# Allegro board VGroupV_PCB.brd
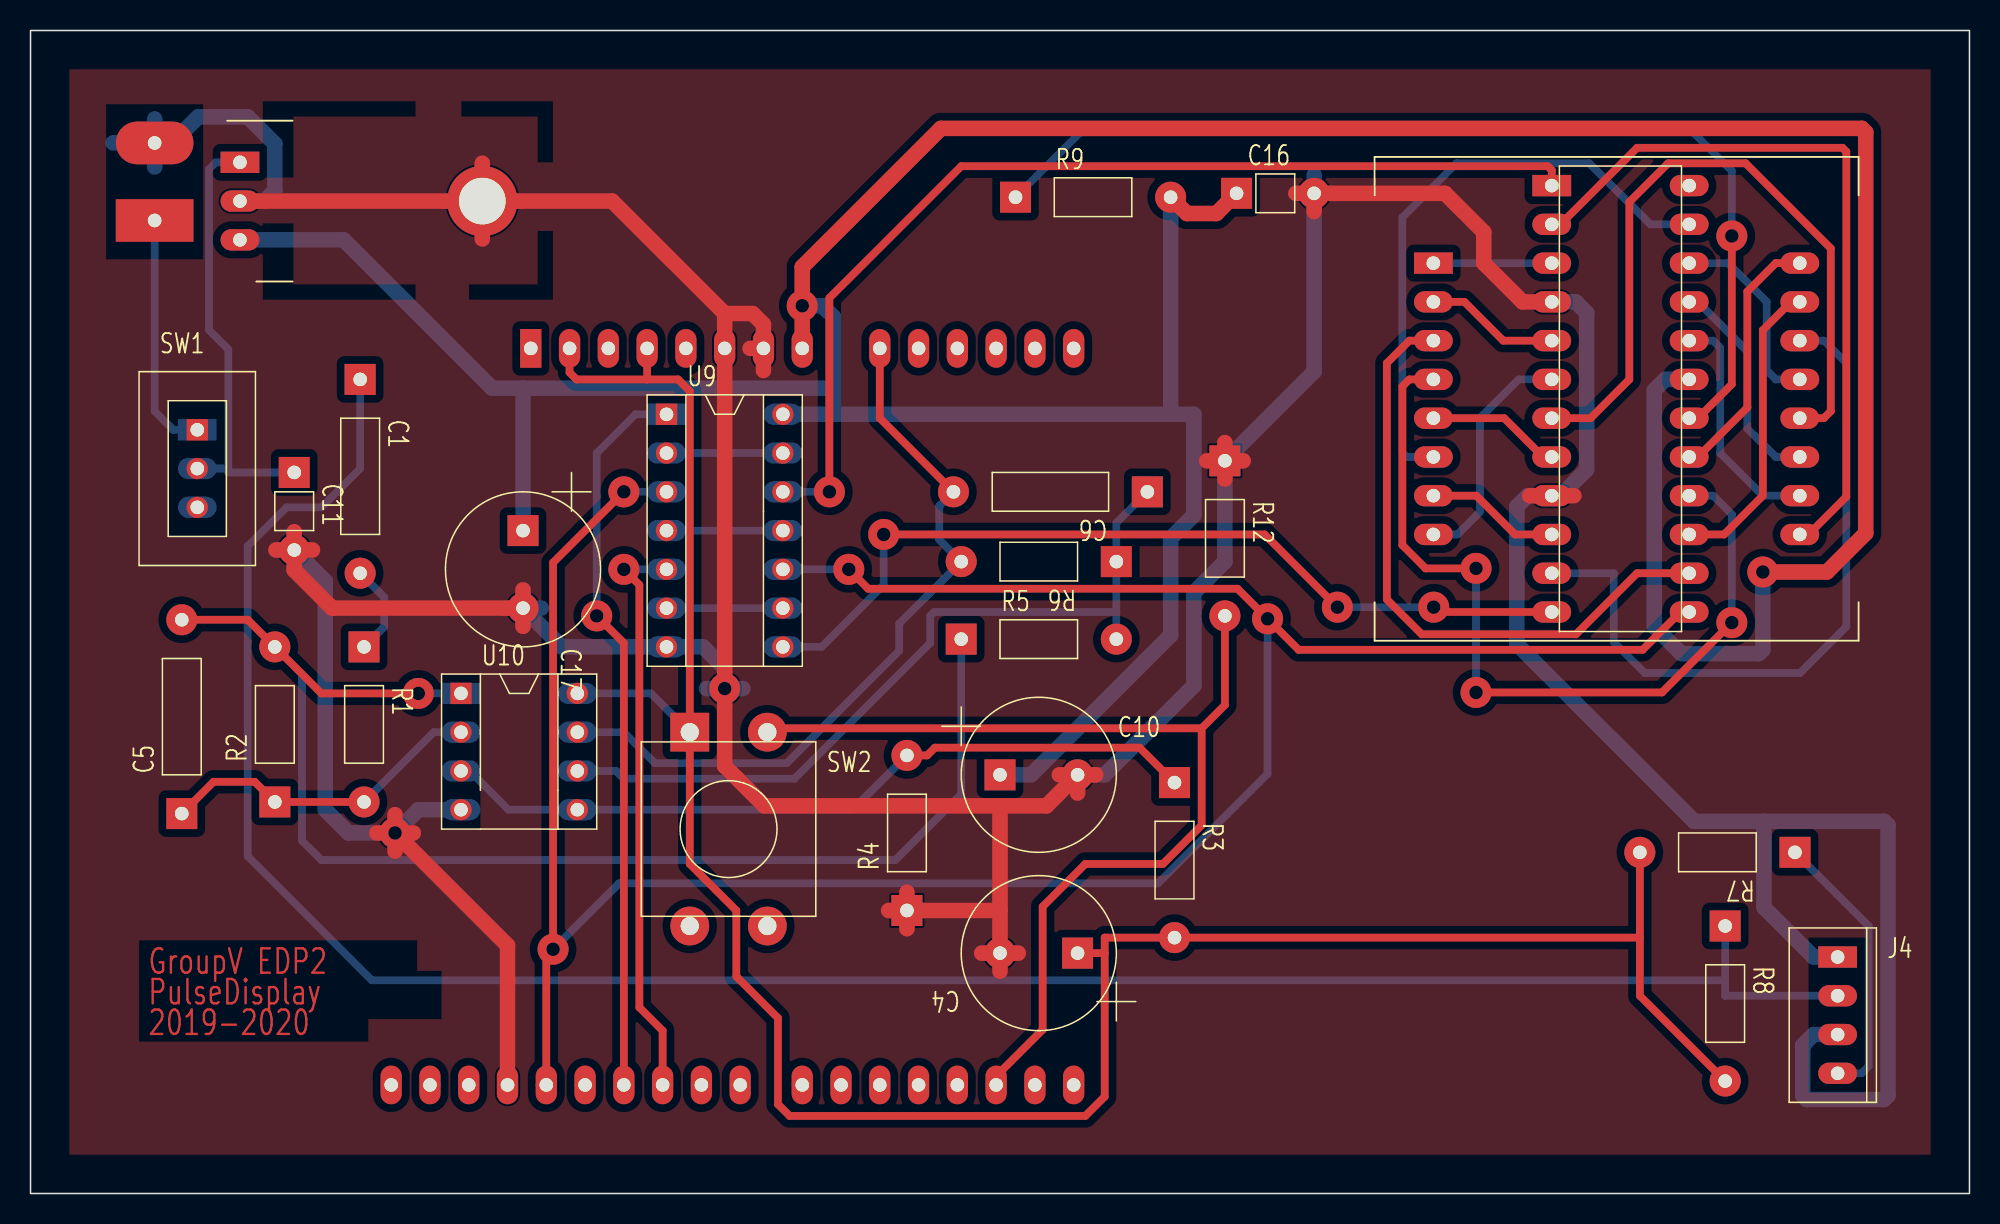
[diagram p0: board, top side]
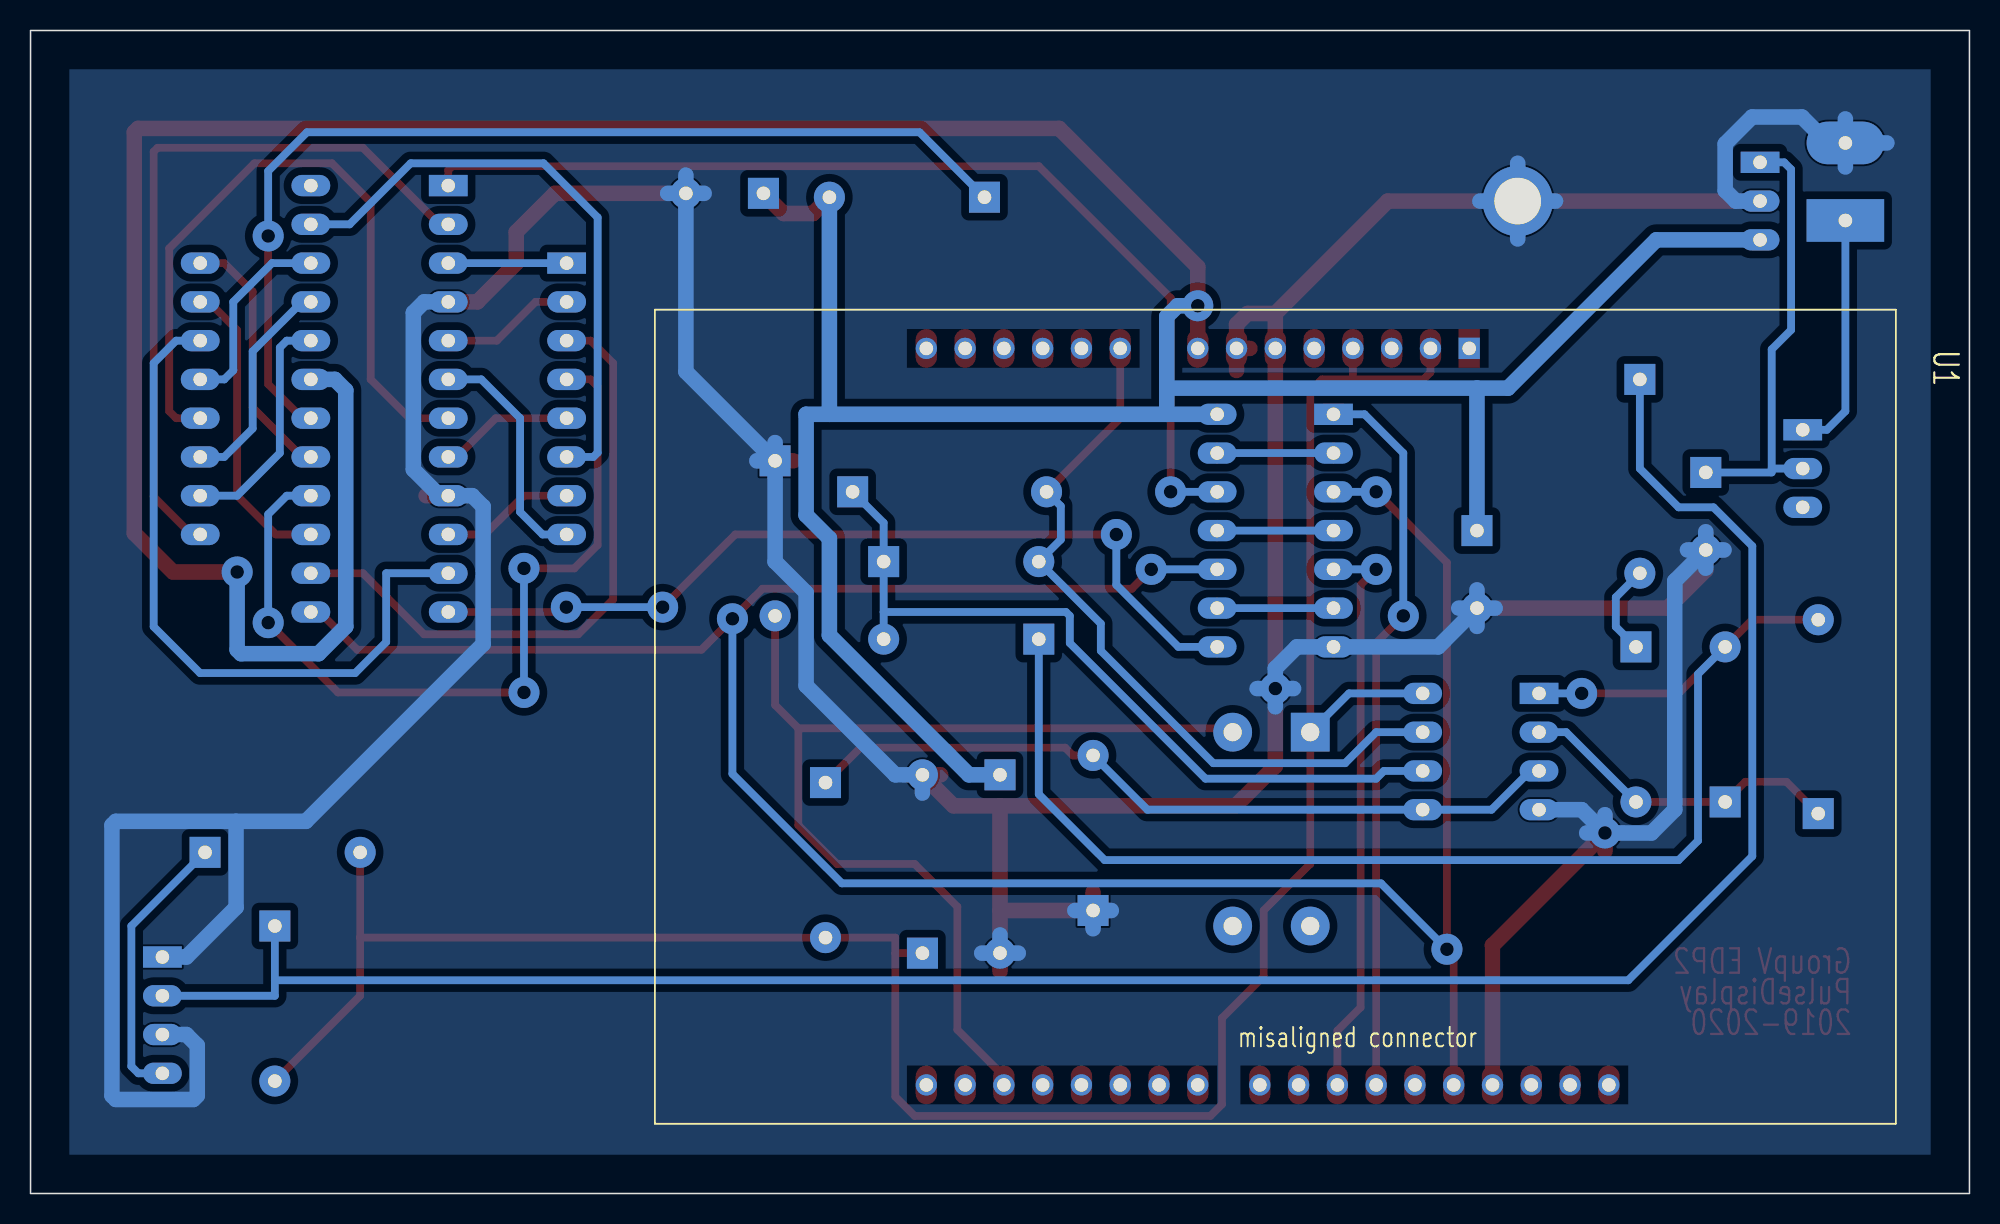
[diagram p1: board, bottom side, seen from below]

Outline 127 x 76.2 mm; copper layers: TOP, BOTTOM. Coordinates in mm from the lower left corner of the outline.
Outline path: rectangle 0,0 127,76.2

## Design rules (mm)
constraint set DEFAULT: min track width 0.508
nets with their own width: min track width 1.016; nets GND VCC

## Placement (name value [footprint] x y rotation side)
C1  1u  [GU-RC500]  21.59 53.34 270 top
C4  220U  [GU-CAPCYL200]  68.58 15.75 180 top
C5  1n  [GU-RC500]  9.91 24.89 90 top
C6  1n  [GU-RC500]  73.15 45.97 180 top
C10  220u  [GU-CAPCYL200]  63.5 27.43 0 top
C11  0.1u  [GU-RC200]  17.27 47.24 270 top
C16  0.1u  [GU-RC200]  78.99 65.53 0 top
C17  10u  [GU-CAPCYL200]  32.26 43.43 270 top
DN1  LedArr-8x8  [8X8-LED-TRUOPTO]  103.89 52.07 270 top
J1  BATTERY 9V  [GU-TERMINAL2-200]  8.13 63.75 180 top
J4  CON4  [GU-MOLEX4]  118.36 15.49 0 top
R1  10k  [GU-RC400]  21.84 35.81 270 top
R2  50k  [GU-RC400]  16 25.65 90 top
R3  100k  [GU-RC400]  74.93 26.92 270 top
R4  100k  [GU-RC400]  57.4 18.54 90 top
R5  1k  [GU-RC400]  60.96 36.32 0 top
R6  50k  [GU-RC400]  71.12 41.4 180 top
R7  100  [GU-RC400]  115.57 22.35 180 top
R8  10k  [GU-RC400]  111 17.53 270 top
R9  30k  [GU-RC400]  64.52 65.28 0 top
R12  3k3  [GU-RC400]  78.23 48.01 270 top
SW1  SW_SL_SPDT  [GU-SW-SLIDE-SPDT]  10.92 50.04 0 top
SW2  SW PUSHBUTTON-SPST-2/SM  [GU-PUSH52]  43.18 30.23 0 top
U1  FRDM-KL25Z-Arduino  [GU-FRDM-ARDUINO]  32.77 55.37 270 bottom
U5  LM2937  [GU-LM2937]  13.72 67.56 0 top
U8  MAX7221  [GU-DIP24]  104.14 52.07 0 top
U9  74HCT04  [GU-DIPSOCK14]  41.66 51.05 0 top
U10  MCP6292  [GU-DIPSOCK8]  28.19 32.77 0 top

## Library data of the parts
C1 C5 C6 = C
C4 = C_elect_0
C10 C11 C16 C17 = CAPACITOR NON-POL
DN1 = LedArr-8x8
J1 = CON2: User Part Number: TERMINAL2-200
J4 = CON4
R1-R9 R12 = R
SW1 = SW_SL_SPDT
SW2 = SW PUSHBUTTON-SPST-2/SM_1
U1 = FRDM-KL25Z-Arduino
U5 = LM2937_0
U8 = MAX7221_7
U9 = 74HCT04
U10 = MCP6292

## Footprints (pads in the part's own frame, mm; a bottom-side part is the same pattern mirrored in y, then rotated)
8X8-LED-TRUOPTO
  rect 1.397x2.54 hole 0.889: 1(-8.89,-12)
  oval 1.397x2.54 hole 0.889: 2(-6.35,-12) 3(-3.81,-12) 4(-1.27,-12) 5(1.27,-12) 6(3.81,-12) 7(6.35,-12) 8(8.89,-12) 9(8.89,12) 10(6.35,12) 11(3.81,12) 12(1.27,12) 13(-1.27,12) 14(-3.81,12) 15(-6.35,12) 16(-8.89,12)
GU-CAPCYL200
  rect 2.032x2.032 hole 0.889: 1(0,0)
  round 2.032 hole 0.889: 2(5.08,0)
GU-DIP24
  rect 2.54x1.397 hole 0.889: 1(-4.5,13.97)
  oval 2.54x1.397 hole 0.889: 2(-4.5,11.43) 3(-4.5,8.89) 4(-4.5,6.35) 5(-4.5,3.81) 6(-4.5,1.27) 7(-4.5,-1.27) 8(-4.5,-3.81) 9(-4.5,-6.35) 10(-4.5,-8.89) 11(-4.5,-11.43) 12(-4.5,-13.97) 13(4.5,-13.97) 14(4.5,-11.43) 15(4.5,-8.89) 16(4.5,-6.35) 17(4.5,-3.81) 18(4.5,-1.27) 19(4.5,1.27) 20(4.5,3.81) 21(4.5,6.35) 22(4.5,8.89) 23(4.5,11.43) 24(4.5,13.97)
GU-DIPSOCK8
  rect 1.397x1.397 hole 0.889: 1(0,0)
  round 1.397 hole 0.889: 2(0,-2.54) 3(0,-5.08) 4(0,-7.62) 5(7.62,-7.62) 6(7.62,-5.08) 7(7.62,-2.54) 8(7.62,0)
GU-DIPSOCK14
  rect 1.397x1.397 hole 0.889: 1(0,0)
  round 1.397 hole 0.889: 2(0,-2.54) 3(0,-5.08) 4(0,-7.62) 5(0,-10.16) 6(0,-12.7) 7(0,-15.24) 8(7.62,-15.24) 9(7.62,-12.7) 10(7.62,-10.16) 11(7.62,-7.62) 12(7.62,-5.08) 13(7.62,-2.54) 14(7.62,0)
GU-FRDM-ARDUINO
  rect 2.54x1.397 hole 0.889: 1(0,0)
  oval 2.54x1.397 hole 0.889: 2(0,-2.54) 3(0,-5.08) 4(0,-7.62) 5(0,-10.16) 6(0,-12.7) 7(0,-15.24) 8(0,-17.78) 9(0,-22.86) 10(0,-25.4) 11(0,-27.94) 12(0,-30.48) 13(0,-33.02) 14(0,-35.56) 15(48.26,-35.56) 16(48.26,-33.02) 17(48.26,-30.48) 18(48.26,-27.94) 19(48.26,-25.4) 20(48.26,-22.86) 21(48.26,-20.32) 22(48.26,-17.78) 23(48.26,-13.716) 24(48.26,-11.176) 25(48.26,-8.636) 26(48.26,-6.096) 27(48.26,-3.556) 28(48.26,-1.016) 29(48.26,1.524) 30(48.26,4.064) 31(48.26,6.604) 32(48.26,9.144)
GU-LM2937
  rect 2.54x1.397 hole 0.889: 1(0,0)
  oval 2.54x1.397 hole 0.889: 2(0,-2.54) 3(0,-5.08)
  round 4.6 hole 3.05: 4(15.875,-2.54)
GU-MOLEX4
  rect 2.54x1.397 hole 0.889: 1(0,0)
  oval 2.54x1.397 hole 0.889: 2(0,-2.54) 3(0,-5.08) 4(0,-7.62)
GU-PUSH52
  rect 2.54x2.54 hole 1.194: 1(0,0)
  round 2.54 hole 1.194: 2(5.08,0) 3(0,-12.7) 4(5.08,-12.7)
GU-RC200
  rect 2.032x2.032 hole 0.889: 1(0,0)
  round 2.032 hole 0.889: 2(5.08,0)
GU-RC400
  rect 2.032x2.032 hole 0.889: 1(0,0)
  round 2.032 hole 0.889: 2(10.16,0)
GU-RC500
  rect 2.032x2.032 hole 0.889: 1(0,0)
  round 2.032 hole 0.889: 2(12.7,0)
GU-SW-SLIDE-SPDT
  rect 1.397x1.397 hole 0.889: 1(0,0)
  round 1.397 hole 0.889: 2(0,-2.54) 3(0,-5.08)
GU-TERMINAL2-200
  rect 5.08x2.794 hole 0.889: 1(0,0)
  oval 5.08x2.794 hole 0.889: 2(0,-5.08)

## Nets
3V3: C4.1 R3.2 R7.2 R8.2 SW2.1(4) U1.2 U1.4 U10.8
GND: C4.2(-) C10.2 C11.2 C16.2 C17.2 J1.2 J4.1 J4.3 R4.1 R12.1 U1.6 U1.7 U1.29 U5.2 U5.4 U8.4 U8.9 U9.7 U10.4
VCC: C10.1 C16.1 C17.1 R9.2 U1.8 U5.3(OUT) U8.19(VCC) U9.14
VIN: C1.1 J4.2 R8.1
CS: U8.12 U9.8
LOAD: U1.25 U9.5
MOSI: U1.26 U9.1
SCLK: U1.28 U8.13 U9.3 U9.10
SDI: U8.1 U9.12(Y)
VOUT: C6.2 R6.2 U1.9 U10.7(OUT)
VREF: R3.1 R4.2 U10.3 U10.5
N08137: C5.1 R1.2 R2.1 U10.2
N08145: C5.2 R2.2 R5.1 U10.1
N08157: C6.1 R5.2 R6.1 U10.6
N08433: C1.2 R1.1
N10280: J4.4 R7.1
N13184: U9.4 U9.11
N13188: U9.2 U9.13
N13195: U9.6 U9.9
N25169: DN1.16 U8.17
N25451: DN1.13 U8.22
N25464: DN1.3 U8.14
N25471: DN1.4 U8.16
N25478: DN1.10 U8.20
N25485: DN1.6 U8.23
N25492: DN1.11 U8.21
N25499: DN1.15 U8.15
N28309: J1.1 SW1.1
N28319: C11.1 SW1.2 U5.1
N29244: R12.2 SW2.2 U1.17
N68469: R9.1 U8.18
N1135613: DN1.9 U8.2
N1135614: DN1.14 U8.11
N1135615: DN1.8 U8.6
N1135616: DN1.12 U8.7
N1135617: DN1.1 U8.3
N1135618: DN1.7 U8.10
N1135619: DN1.2 U8.5
N1135620: DN1.5(RA8) U8.8

Pads without a net: SW1 3; SW2 3 4; U1 1 3 5 10 11 12 13 14 15 16 18 19 20 21 22 23 24 27 30 31 32; U8 24

## Via types
v1: diameter 2.032, hole 0.889, TOP to BOTTOM, 19 vias

## Routing (per net, layer and track width the routed paths; a pad name or vN(x,y) marks a point on that pad's centre or on a via; arc(x,y) is an arc through that point)
3V3: length 156.3
  TOP w0.508: C4.1 70.36,15.75 ; 70.36,15.75 70.36,16.76 R3.2 105.41,16.76 ; 70.36,15.75 70.36,6.35 69.09,5.08 49.72,5.08 48.96,5.84 48.96,11.49 46.23,14.22 46.23,18.54 43.18,21.59 SW2.1 43.18,52.58 42.42,53.34 40.39,53.34 ; 105.41,16.76 105.41,12.95 R8.2 ; 105.41,16.76 R7.2 ; U1.2 35.31,53.8 35.76,53.34 40.39,53.34 ; 40.39,53.34 U1.4
  BOTTOM w0.508: SW2.1 40.64,32.77 U10.8
GND: length 453.3
  TOP w1.016: R4.1 63.5,18.54 ; R4.1 57.4,17.35 ; R4.1 57.4,19.74 ; R4.1 56.21,18.54 ; 63.5,18.54 C4.2 ; 63.5,18.54 63.5,25.4 ; 29.59,62.55 U5.4 ; U5.4 U5.2 ; U5.4 38.1,65.02 45.47,57.66 ; U5.4 29.59,67.5 ; U8.4 97.73,58.42 95.19,60.96 95.19,62.99 92.65,65.53 C16.2 ; 78.23,46.81 R12.1 ; R12.1 77.04,48.01 ; R12.1 79.43,48.01 ; R12.1 78.23,49.2 ; C4.2 62.31,15.75 ; C4.2 63.5,14.55 ; C4.2 64.69,15.75 ; 63.5,25.4 48.07,25.4 45.47,28 v1(45.47,33.08) U1.6 45.47,57.66 ; 63.5,25.4 66.55,25.4 C10.2 ; v1(23.88,23.62) 25.07,23.62 ; v1(23.88,23.62) 23.88,22.43 ; v1(23.88,23.62) 31.24,16.26 U1.29 ; v1(23.88,23.62) 23.88,24.82 ; v1(23.88,23.62) 22.68,23.62 ; 101.09,45.72 U8.9 98.19,45.72 ; 84.07,64.34 C16.2 ; C16.2 82.88,65.53 ; 67.39,27.43 C10.2 ; C10.2 68.58,26.24 ; C10.2 69.77,27.43 ; 32.26,37.16 C17.2 ; C17.2 19.76,38.35 17.27,40.84 C11.2 ; C17.2 32.26,39.55 ; C11.2 18.47,42.16 ; C11.2 16.08,42.16 ; C11.2 17.27,43.36 ; 45.47,57.66 47.29,57.66 48.01,56.95 U1.7 ; 47.13,55.37 U1.7 ; U1.7 48.01,53.92
  BOTTOM w1.016: v1(23.88,23.62) 23.88,24.82 ; v1(23.88,23.62) 25.4,25.15 U10.4 ; v1(23.88,23.62) 20.83,23.62 19.3,25.15 19.3,40.13 C11.2 ; v1(23.88,23.62) 25.07,23.62 ; 5.41,68.83 J1.2 ; J1.2 8.13,70.41 ; J1.2 9.27,68.83 10.97,70.54 14.24,70.54 16,68.77 16,65.72 15.3,65.02 U5.2 ; J1.2 8.13,67.26 ; 68.58,26.24 C10.2 70.36,27.43 76.2,33.27 76.2,39.37 78.23,41.4 R12.1 ; 17.27,40.97 C11.2 ; C11.2 17.27,43.36 ; C11.2 18.47,42.16 ; C11.2 16.08,42.16 ; v1(45.47,33.08) 46.66,33.08 ; v1(45.47,33.08) 45.47,34.4 44.06,35.81 U9.7 34.8,35.81 C17.2 ; v1(45.47,33.08) 45.47,31.89 ; v1(45.47,33.08) 44.27,33.08 ; U5.4 32.07,65.02 ; U5.4 29.59,62.55 ; U5.4 27.11,65.02 ; U5.4 29.59,67.5 ; C16.2 84.07,66.73 ; C16.2 85.27,65.53 ; C16.2 84.07,53.85 R12.1 ; C16.2 82.88,65.53 ; 62.31,15.75 C4.2 ; C4.2 64.69,15.75 ; C4.2 63.5,16.94 ; R12.1 79.43,48.01 ; R12.1 78.23,49.2 ; C17.2 33.45,38.35 ; C17.2 32.26,39.55 ; C17.2 31.06,38.35 ; C17.2 32.26,37.16 ; 113.54,24.38 108.97,24.38 97.35,36 97.35,45.01 98.07,45.72 U8.9 100.21,45.72 101.93,47.43 101.93,57.71 101.21,58.42 U8.4 ; 113.54,24.38 113.54,18.75 116.79,15.49 J4.1 ; 113.54,24.38 121.41,24.38 121.67,24.13 121.67,6.41 121.41,6.16 116.33,6.16 116.08,6.41 116.08,9.7 116.79,10.41 J4.3 ; 56.21,18.54 R4.1 ; R4.1 57.4,17.35 ; R4.1 58.6,18.54
VCC: length 281.5
  TOP w1.016: R9.2 75.74,64.21 77.67,64.21 C16.1 ; U1.8 v1(50.55,58.17) 50.55,60.71 59.63,69.79 119.95,69.79 120.2,69.53 120.2,43.26 117.66,40.72 v1(113.47,40.72)
  BOTTOM w1.016: U5.3 20.51,62.48 30.23,52.77 32.26,52.77 ; v1(50.55,58.17) 51.87,58.17 52.58,57.45 52.58,52.77 ; 74.68,51.05 76.2,51.05 76.2,44.45 74.68,42.93 74.68,36.58 65.53,27.43 C10.1 ; 74.68,51.05 R9.2 ; 74.68,51.05 52.58,51.05 ; C17.1 32.26,52.77 ; 32.26,52.77 52.58,52.77 ; 52.58,52.77 52.58,51.05 ; 52.58,51.05 U9.14 ; U8.19 107.07,53.34 106.35,52.63 106.35,37.15 108.13,35.37 113.21,35.37 113.47,35.62 v1(113.47,40.72)
VIN: length 147.7
  BOTTOM w0.508: 111,13.97 22.35,13.97 14.22,22.1 14.22,42.42 16.76,44.96 19.05,44.96 21.59,47.5 C1.1 ; 111,13.97 111,12.95 J4.2 ; 111,13.97 R8.1
CS: length 57.5
  TOP w0.508: v1(55.88,43.18) 80.84,43.18 v1(85.6,38.42) ; U8.12 92.22,38.1 v1(91.9,38.42)
  BOTTOM w0.508: v1(91.9,38.42) v1(85.6,38.42) ; v1(55.88,43.18) 55.88,39.88 51.82,35.81 U9.8
LOAD: length 37.6
  TOP w0.508: U1.25 41.4,10.67 39.88,12.19 39.88,39.88 v1(38.86,40.89)
  BOTTOM w0.508: U9.5 v1(38.86,40.89)
MOSI: length 47.8
  TOP w0.508: v1(37.08,37.85) 38.86,36.07 U1.26
  BOTTOM w0.508: v1(37.08,37.85) 37.08,48.51 39.62,51.05 U9.1
SCLK: length 168.1
  TOP w0.508: U1.28 33.78,15.56 v1(34.23,16) 34.23,41.34 v1(38.86,45.97) ; v1(53.59,40.89) 54.86,39.62 79.06,39.62 v1(81.03,37.66) 83.06,35.62 105.59,35.62 108.07,38.1 U8.13
  BOTTOM w0.508: v1(81.03,37.66) 81.03,27.5 73.85,20.32 38.54,20.32 v1(34.23,16) ; U9.3 v1(38.86,45.97) ; U9.10 v1(53.59,40.89)
SDI: length 67.8
  TOP w0.508: v1(52.32,45.97) 52.32,58.67 60.96,67.31 99.37,67.31 99.64,67.04 U8.1
  BOTTOM w0.508: U9.12 v1(52.32,45.97)
VOUT: length 49.5
  TOP w0.508: U1.9 55.63,50.8 C6.2
  BOTTOM w0.508: U10.7 38.86,30.23 40.89,28.19 49.53,28.19 56.9,35.56 56.9,37.34 R6.2 59.52,42.84 59.52,45.04 C6.2
VREF: length 50.4
  TOP w0.508: R4.2 58.72,28.7 59.23,29.21 72.64,29.21 R3.1
  BOTTOM w0.508: U10.3 28.77,27.69 31.31,25.15 U10.5 53.85,25.15 R4.2
N08137: length 21.6
  TOP w0.508: C5.1 11.99,26.98 14.68,26.98 R2.1 R1.2
  BOTTOM w0.508: U10.2 26.42,30.23 R1.2
N08145: length 89.4
  TOP w0.508: C5.2 14.22,37.59 R2.2 19.05,32.77 v1(25.4,32.77)
  BOTTOM w0.508: R5.1 60.96,26.16 56.64,21.84 19.05,21.84 17.78,23.11 17.78,34.04 R2.2 ; U10.1 v1(25.4,32.77)
N08157: length 51.6
  BOTTOM w0.508: R5.2 71.12,38.1 ; 71.12,38.1 R6.1 71.12,43.94 C6.1 ; 71.12,38.1 59.18,38.1 58.93,37.85 58.93,36.07 50.04,27.18 38.86,27.18 38.35,27.69 U10.6
N08433: length 6
  BOTTOM w0.508: C1.2 23.17,39.06 23.17,37.14 R1.1
N10280: length 18.2
  BOTTOM w0.508: J4.4 119.94,7.87 120.4,8.33 120.4,17.53 R7.1
N13184: length 7.6
  BOTTOM w0.508: U9.4 U9.11
N13188: length 7.6
  BOTTOM w0.508: U9.2 U9.13
N13195: length 7.6
  BOTTOM w0.508: U9.6 U9.9
N25169: length 17
  TOP w0.508: U8.17 109.21,48.26 112.45,51.5 112.45,59.1 114.31,60.96 DN1.16
N25451: length 13
  BOTTOM w0.508: U8.22 111.18,60.96 113.72,58.42 113.72,53.93 114.31,53.34 DN1.13
N25464: length 41.5
  TOP w0.508: U8.14 105.23,40.64 101.23,36.64 91.12,36.64 88.84,38.93 88.84,54.41 90.31,55.88 DN1.3
N25471: length 55.3
  TOP w0.508: DN1.4 90.31,53.34 89.85,52.88 89.85,42.48 91.38,40.96 v1(94.68,40.96) ; v1(111.43,37.4) 106.86,32.83 v1(94.68,32.83)
  BOTTOM w0.508: v1(111.43,37.4) 111.43,44.5 110.21,45.72 U8.16 ; v1(94.68,32.83) v1(94.68,40.96)
N25478: length 15.5
  BOTTOM w0.508: DN1.10 113.47,45.72 110.67,48.51 110.67,55.42 110.21,55.88 U8.20
N25485: length 39.5
  BOTTOM w0.508: U8.23 106.1,63.5 102.1,67.5 93.4,67.5 89.85,63.95 89.85,48.55 90.14,48.26 DN1.6
N25492: length 14.4
  BOTTOM w0.508: DN1.11 114.31,48.26 112.45,50.12 112.45,55.18 109.21,58.42 U8.21
N25499: length 19.9
  TOP w0.508: DN1.15 115.31,58.42 113.47,56.57 113.47,45.72 110.93,43.18 U8.15
N28309: length 15.8
  BOTTOM w0.508: J1.1 8.13,51.26 9.35,50.04 SW1.1
N28319: length 29
  BOTTOM w0.508: C11.1 12.95,47.24 12.95,47.5 ; 12.95,47.5 12.95,55.31 11.68,56.58 11.68,67.11 12.14,67.56 U5.1 ; 12.95,47.5 SW1.2
N29244: length 68.5
  TOP w0.508: 76.71,30.48 78.23,32 R12.2 ; 76.71,30.48 76.71,24.13 74.17,21.59 69.09,21.59 66.29,18.8 66.29,10.73 63.25,7.68 U1.17 ; 76.71,30.48 48.51,30.48 SW2.2
N68469: length 67.4
  TOP w0.508: v1(111.43,62.74) 111.43,53.02 109.21,50.8 U8.18
  BOTTOM w0.508: R9.1 68.77,69.53 108.89,69.53 111.43,66.99 v1(111.43,62.74)
N1135613: length 48.2
  TOP w0.508: U8.2 100.21,63.5 105.23,68.52 118.68,68.52 118.93,68.26 118.93,45.66 116.46,43.18 DN1.9
N1135614: length 46.8
  BOTTOM w0.508: U8.11 103.7,40.64 103.7,36.13 105.74,34.1 115.9,34.1 118.93,37.14 118.93,54.41 117.46,55.88 DN1.14
N1135615: length 15.6
  BOTTOM w0.508: U8.6 97.47,53.34 94.93,50.8 94.93,44.65 93.46,43.18 DN1.8
N1135616: length 47.2
  TOP w0.508: DN1.12 117.46,50.8 117.92,51.26 117.92,61.92 112.34,67.5 107.26,67.5 104.72,64.96 104.72,53.34 102.18,50.8 U8.7
N1135617: length 7.8
  BOTTOM w0.508: U8.3 DN1.1
N1135618: length 8.8
  TOP w0.508: U8.10 97.24,43.18 94.7,45.72 DN1.7
N1135619: length 8.8
  TOP w0.508: U8.5 96.46,55.88 93.92,58.42 DN1.2
N1135620: length 8.8
  TOP w0.508: U8.8 99.07,48.26 96.53,50.8 DN1.5

## Copper pours and planes (outline as drawn; the poured copper is in the pictures)
GND on TOP: 2.54,73.66 124.46,73.66 124.46,2.54 2.54,2.54 ; 11 cut-outs
GND on BOTTOM: 2.54,73.66 124.46,73.66 124.46,2.54 2.54,2.54 ; 9 cut-outs

## Text on the board
TOP: GroupV EDP2 | PulseDisplay | 2019-2020
